# Altium PCB RF315.PcbDoc
Units mil, origin at the board's own origin, x right, y up, seen from the top; angles counter-clockwise.
Board outline 6000 x 4000 mil, 2 copper layers (Top Layer, Bottom Layer); 22 components, 19 nets, 71 pads, 2 vias.
Unrouted connection lines stored in the file: 4.
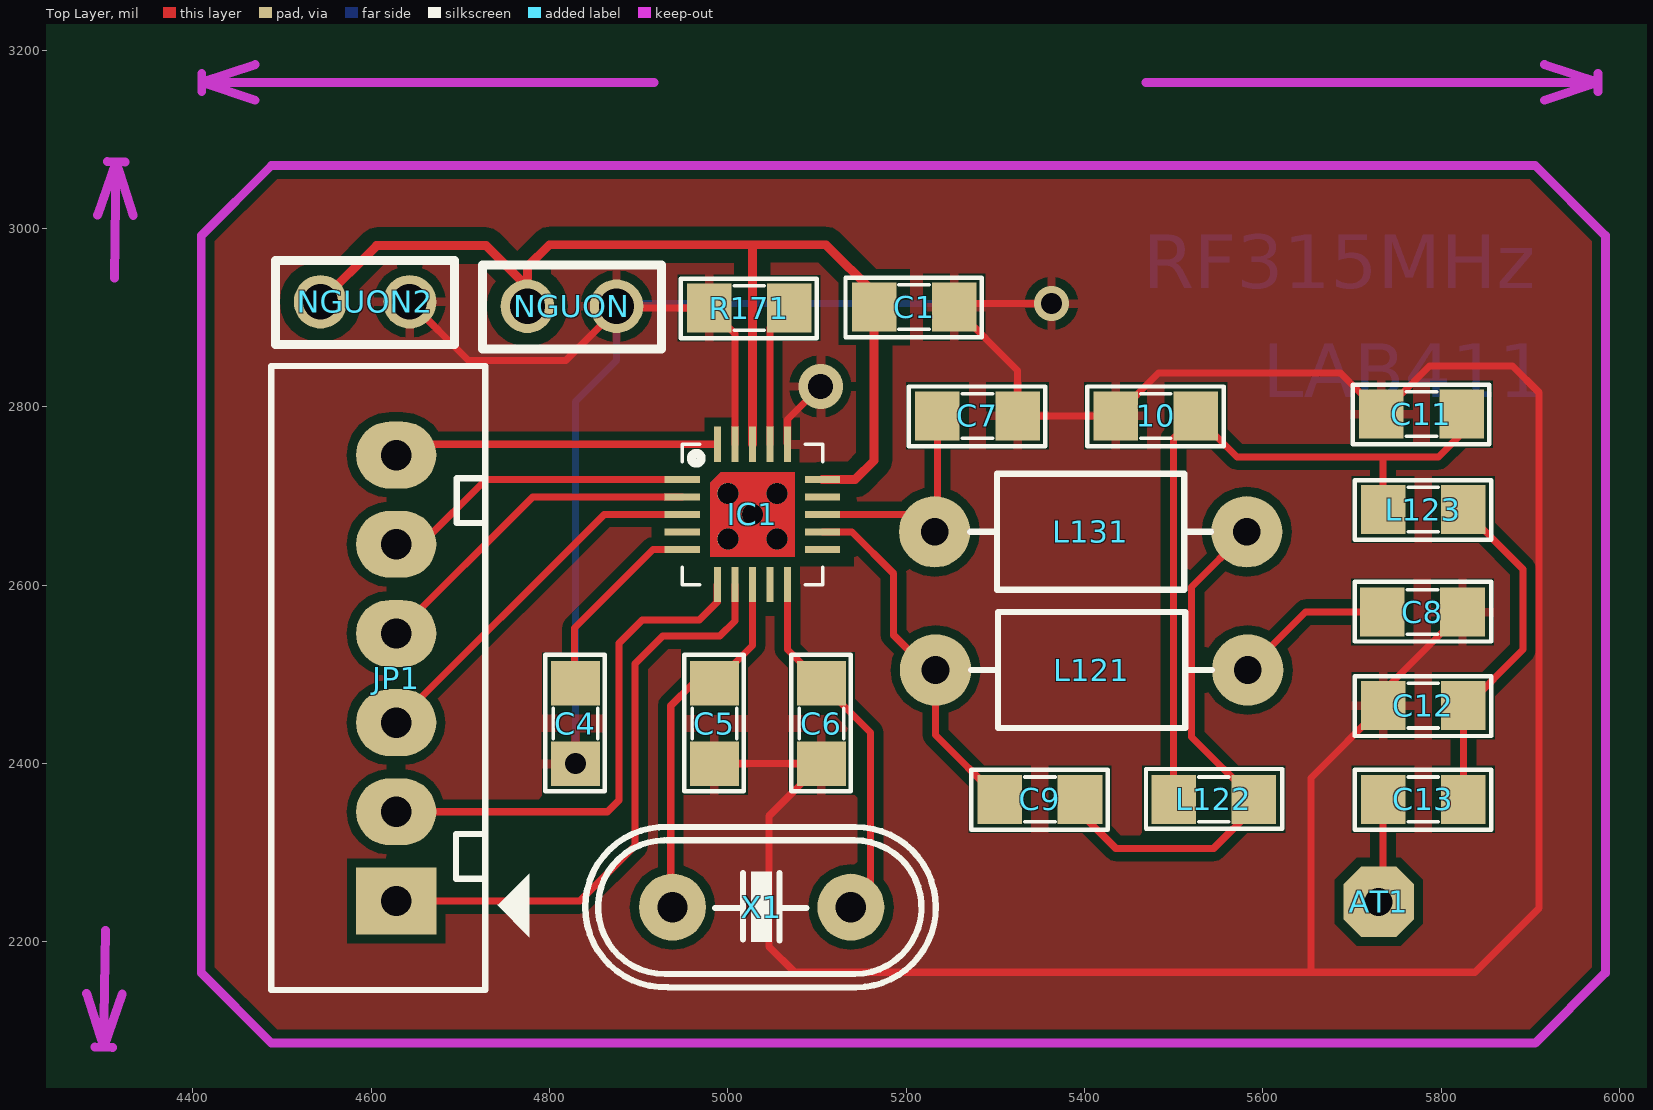
[diagram p0: Top Layer view]
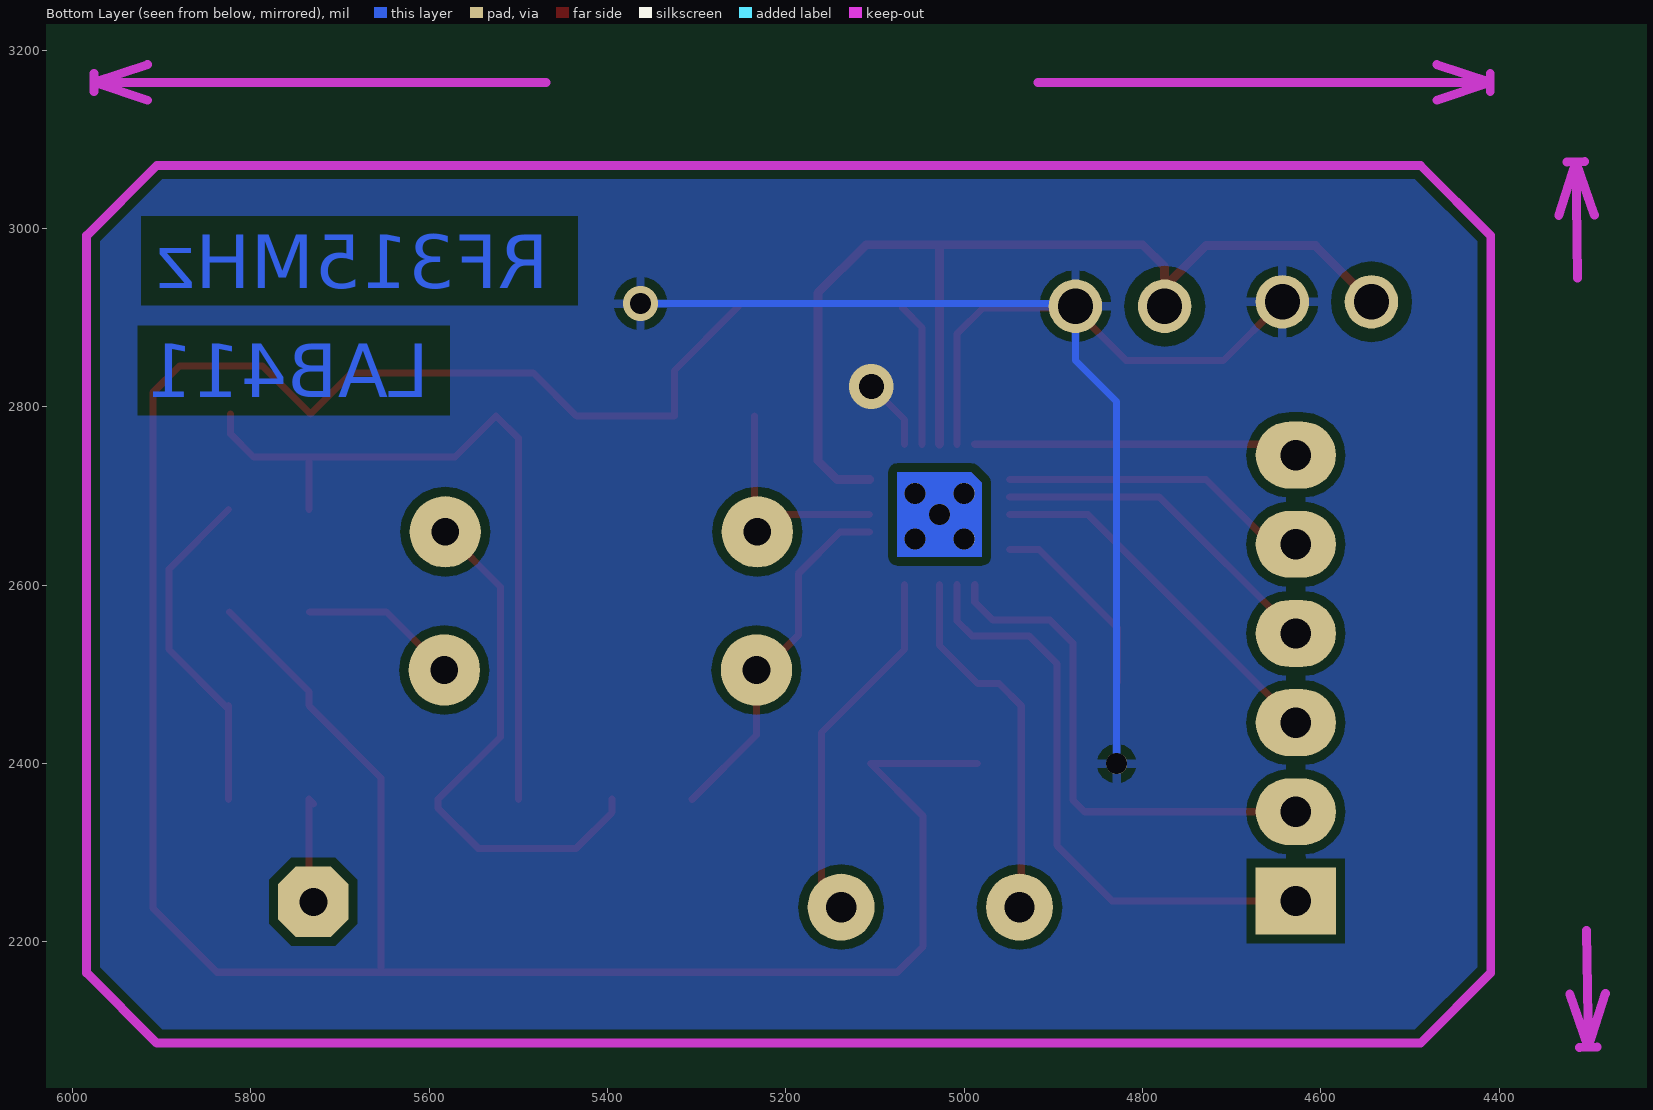
[diagram p1: Bottom Layer view, seen from below]
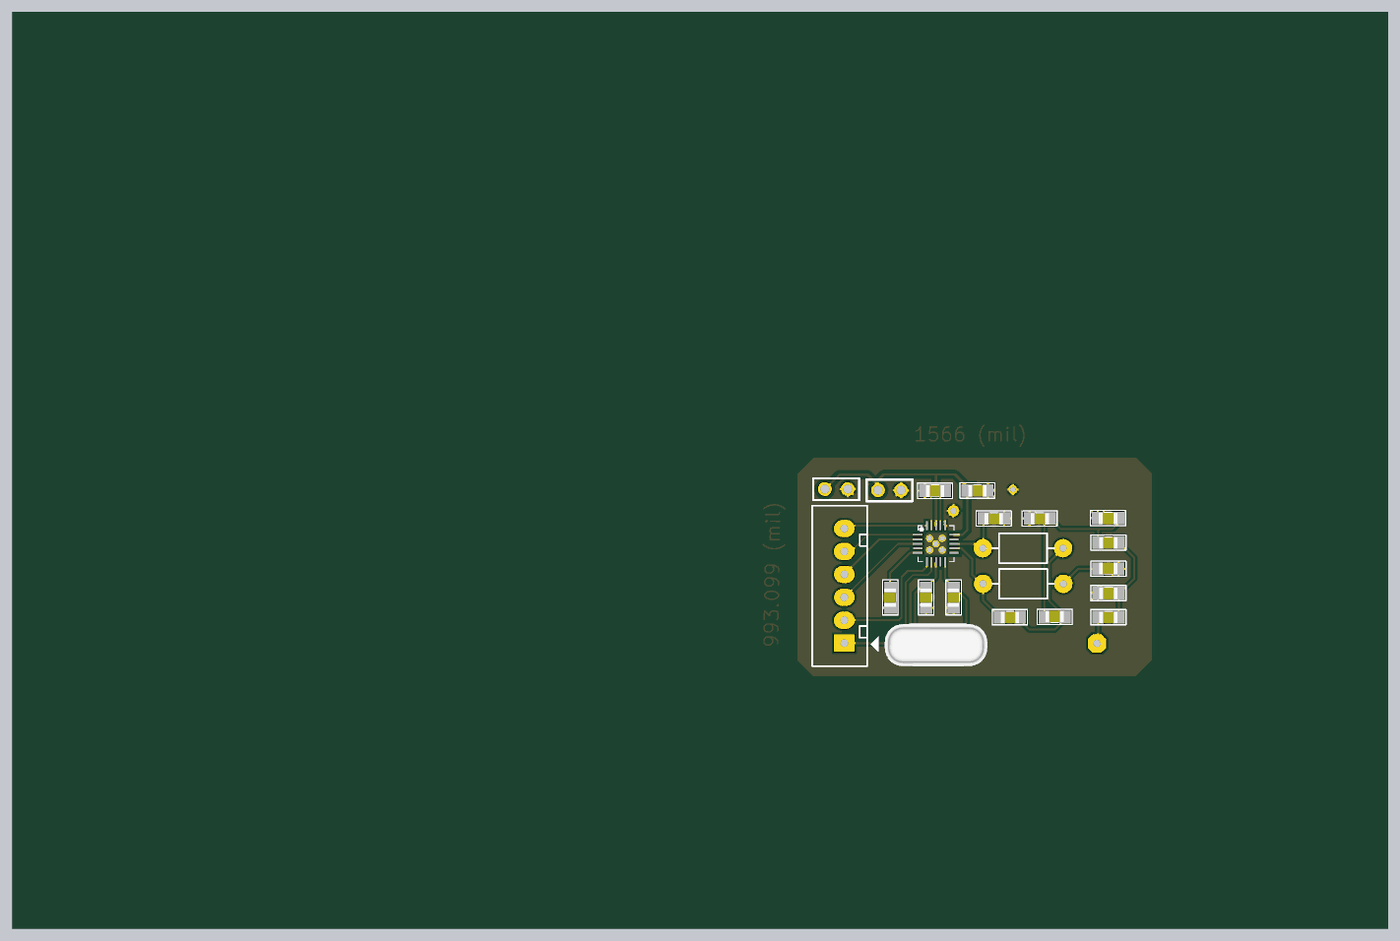
[diagram p2: 3D render of the assembled board from above, using the file's embedded part models]

## Layer stack, top to bottom
Top Layer: signal copper 1.4
Dielectric: dielectric 12.6, FR-4, Dk 4.8
Bottom Layer: signal copper 1.4

## Board outline
1000,1000 7000,1000 7000,5000 1000,5000

## Design rules (kind name [scope] priority, off if disabled: settings)
Clearance Clearance_1 [InNet('3.3V')] p1: gap=15
Clearance [All] p2: gap=10
PolygonConnect [All] p1: connectstyle=Relief reliefconductorwidth=10 reliefentries=4 polygonreliefangle="90 Angle" airgapwidth=10
RoutingVias [All] p1: holewidth=28 width=50 viastyle="Through Hole" minholewidth=28 minwidth=50 maxholewidth=28 maxwidth=50
SolderMaskExpansion [All] p1: expansion=4
Width Width_1 [InNet('3.3V')] p1: maxlimit=10 minlimit=10 preferedwidth=10
Width [All] p2: maxlimit=8 minlimit=8 preferedwidth=8
28 further rules are at their usual default settings.

## Components (designator, comment, footprint, x,y, rotation, side; value= is the part's Value field where it differs from the comment)
10 "33" SM-0805 5480,2790 r0 top
AT1 "Anten" VIT 5730,2245 r0 top
C1 "101" SM-0805 5209,2912 r0 top
C4 "101" SM-0805 4829,2445 r270 top
C5 "27" SM-0805 4985,2445 r270 top
C6 "27" SM-0805 5105,2445 r270 top
C7 "6.8" SM-0805 5280,2790 r0 top
C8 "220" SM-0805 5779,2570 r180 top
C9 "15" SM-0805 5350,2360 r0 top
C11 "33" SM-0805 5778,2792 r0 top
C12 "6.8" SM-0805 5780,2465 r0 top
C13 "220" SM-0805 5780,2360 r0 top
IC1 "CC1100E" CC1101-20P 4752,3270 r0 top
JP1 "JP6" CON6 4628,2246 r90 top
L121 "150mH" L/0.4 5583,2505 r180 top
L122 "150mH" SM-0805 5545,2360 r180 top
L123 "150mH" SM-0805 5780,2685 r0 top
L131 "150mH" L/0.4 5232,2660 r0 top
NGUON "JP2" CON2 4824,2913 r180 top
NGUON2 "JP2" CON2 4592,2918 r180 top
R171 "33K" SM-0805 5024,2911 r0 top
X1 "4Mhz" XT2 5038,2239 r0 top

## Footprints (in the part's own frame and the unit in brackets; to place one, negate y for a bottom-side part, rotate by r counter-clockwise, add the part's x,y. Pads: shape width x height; smd on the part's side, far side on the other; paste and mask are expansions set on the pad)
CC1101-20P [mm] "CC1101/RF/TI"
  rect 1x0.2 smd: 1(5,-14) 2(5,-14.5) 3(5,-15) 4(5,-15.5) 5(5,-16) 11(9,-16) 12(9,-15.5) 13(9,-15) 14(9,-14.5) 15(9,-14)
  rect 0.2x1 smd: 6(6,-17) 7(6.5,-17) 8(7,-17) 9(7.5,-17) 10(8,-17) 16(8,-13) 17(7.5,-13) 18(7,-13) 19(6.5,-13) 20(6,-13)
  round 0.6 hole 0.6: 32(7,-15) ""(6.3,-15.7) ""(6.3,-14.4) ""(7.7,-15.7) ""(7.7,-14.4)
  Top Layer region: 6.1,-13.8 5.8,-14.1 5.8,-16.2 8.2,-16.2 8.2,-13.8
  Bottom Layer region: 6.1,-13.8 5.8,-14.1 5.8,-16.2 8.2,-16.2 8.2,-13.8
  silkscreen extent 5,-17 9,-13
CON2 [mil] "2-Pin Connector; pitch 2.54mm"
  round 60 hole 39.37: 1(-51.18,0) 2(48.82,0)
  silkscreen extent -102,-46 99,48
CON6 [mil] "CON6"
  rect 75x90 hole 34: 1(0,0)
  oval 75x90 hole 34: 2(100,0) 3(200,0) 4(300,0) 5(400,0) 6(500,0)
  silkscreen extent -100,-150 600,140
L/0.4 [mil] "Inductor , 2 Pin, L 350mil, W 150 mil"
  round 80 hole 31: 1(0,0) 2(350,0)
  silkscreen extent 40,-65 310,65
SM-0805 [mil] "Compoment SMD 80x50mil"
  rect 50x55 smd: 1(-45,0) 2(45,0)
  silkscreen extent -77,-34 76,33, body extent -40,-27 40,23, height 24
VIT [mm] "VIT"
  oct 2x2 hole 0.8: VIT1(0,0)
XT2 [mil] "Footpin for Crystal 2 pin"
  round 75 hole 34: 1(-100,0) 2(100,0)
  silkscreen extent -198,-90 195,90, body extent -233,-93 213,90, height 138

## Part data
10 C1 C4 C5 C6 C7 C8 C9 C11 C12 C13: library part CM, "Cap SMD"
JP1: library part Con6, "Connector 6"
L121 L122 L123 L131: library part L1, "Inductor"
NGUON NGUON2: library part Con2, "Connector 2"
R171: library part R, "Resistor 1/4W"
X1: library part XT2, "Crystal For all Crystal 2pin."

## Free pads (board coordinates)
  round 23.62 hole 23.62: 0(4829,2400)

## Via types
v1: diameter 50, hole 28, Top Layer to Bottom Layer, 1 vias
v2: diameter 39.37, hole 23.62, Top Layer to Bottom Layer, 1 vias

## Nets (pads, with @x,y where several pads share a name; then routed paths per layer and width w, separated by ;. In a path a pad name is that pad's centre, name@x,y a point inside that pad or via, vN(x,y) a via of type N, cw(c..) or ccw(c..) an arc to the next point about the centre after c; other vN are vias at no path point)
3.3V: C1.1 IC1.4 IC1.9 IC1.11 IC1.14 IC1.15 IC1.18 NGUON2.2 NGUON.2 | length 1221.4
  Top Layer w10: NGUON2.2 4606.18,2981 4729,2981 NGUON.2@4775.18,2934.82 ; NGUON.2 NGUON.2@4775.18,2934.82 ; IC1.18 5027.59,2981.41 5027,2982 ; IC1.15 5142.82,2718.82 5164,2740 C1.1 5164,2928 5110,2982 5027,2982 ; NGUON.2@4775.18,2934.82 4775.18,2957.18 4800,2982 5027,2982
CS: IC1.7 JP1.1 | length 670.2
  Top Layer w8: JP1.1 4834,2246 4896,2308 4896,2512 4927,2543 4991,2543 5007.91,2559.91 IC1.7
GDO0: IC1.6 JP1.2 | length 580.2
  Top Layer w8: JP1.2 4865,2346 4878,2359 4878,2535 4904,2561 4968,2561 4988.22,2581.22 IC1.6
GND: 10.1 C1.2 C4.2 C5.2 C6.2 C7.2 C8.1 C11.1 C12.1 IC1.16 IC1.19 NGUON2.1 NGUON.1 pad.0 R171.1 | length 4882.2
  Top Layer w8: NGUON2.1 4709.18,2852 4818.18,2852 4877.18,2911 R171.1 5007.91,2882.09 IC1.19 ; C5.2 C6.2 5046,2341 5046,2195 5075,2166 5654,2166 ; IC1.16 5066.96,2785.96 v1(5104,2823) ; v2(5363,2916) 5258,2916 C1.2 5325,2841 C7.2 10.1 5483,2838 5687,2838 C11.1 5787,2846 5880,2846 5910,2816 5910,2238 5838,2166 5654,2166 ; C8.1 5735,2481 C12.1 5654,2384 5654,2166
  Bottom Layer w8: pad.0 4829,2806 4875.18,2852.18 NGUON.1 4878.18,2916 v2(5363,2916)
GNDO2: IC1.3 JP1.3 | length 417.5
  Top Layer w8: JP1.3 4861.45,2679.45 IC1.3
Net10_2: 10.2 C11.2 L122.2 L123.1 | length 849.6
  Top Layer w8: L122.2 5500,2765 10.2 5571,2744 5734,2744 ; L123.1 5735,2743 5734,2744 ; C11.2 5823,2770 5797,2744 5734,2744
NetAT1_1: AT1.VIT1 C13.1 | length 124.1
  Top Layer w8: AT1.VIT1 5735,2250 C13.1 C13.1@5730,2355
NetC4_1: C4.1 IC1.5 | length 219.7
  Top Layer w8: C4.1 4828,2491 4828,2552 4916.08,2640.08 IC1.5
NetC5_1: C5.1 IC1.8 X1.1 | length 414.5
  Top Layer w8: X1.1 4936,2241 4936,2465 4961,2490 C5.1 5027.59,2532.59 IC1.8
NetC6_1: C6.1 IC1.10 X1.2 | length 409.4
  Top Layer w8: IC1.10 5066.96,2528.04 C6.1 5160,2435 5160,2261 X1.2
NetC7_1: C7.1 IC1.13 L131.1 | length 262.5
  Top Layer w8: IC1.13 5218.55,2679.45 5235,2663 C7.1
NetC8_2: C8.2 L121.1 | length 177.9
  Top Layer w8: L121.1 5648,2570 C8.2
NetC9_1: C9.1 IC1.12 L121.2 | length 406
  Top Layer w8: IC1.12 5139.24,2659.76 5186,2613 5186,2544 5225,2505 L121.2 5233,2432 C9.1
NetC9_2: C9.2 L122.1 L131.2 | length 609.9
  Top Layer w8: C9.2 5395,2345 5435,2305 5545,2305 5590,2350 L122.1 5520,2430 5520,2598 L131.2
NetC12_2: C12.2 C13.2 L123.2 | length 384.5
  Top Layer w8: C13.2 C12.2 5827,2463 5892,2528 5892,2618 L123.2
NetIC1_17: IC1.17 R171.2 | length 161.8
  Top Layer w8: IC1.17 5047.28,2889.28 R171.2
SCK: IC1.1 JP1.5 | length 351
  Top Layer w8: JP1.5 4656,2646 4728.82,2718.82 IC1.1
SI: IC1.20 JP1.6 | length 365.3
  Top Layer w8: JP1.6 4640.19,2758.19 IC1.20
SO: IC1.2 JP1.4 | length 384.3
  Top Layer w8: JP1.4 4781.13,2699.13 IC1.2
pads on no net: IC1. IC1.32

## Polygon pours and split planes (outlines as drawn)
GND on Top Layer "Top Layer-No Net" (solid, remove dead copper, pour order 2): 4485.01,3073.29 4406.27,2994.55 4406.27,2173.43 4485.01,2094.69 4485.01,2089.04 5902.33,2089.04 5981.07,2167.78 5981.08,2167.78 5981.08,2994.55 5981.07,2994.55 5904.82,3070.81 4487.5,3070.81 4485.01,3073.29 4478.82,3067.1
GND on Bottom Layer "Top Layer-No Net" (solid, remove dead copper, pour order 8): 5905.51,3070.87 5984.25,2992.13 5984.25,2165.35 5905.51,2086.61 4488.19,2086.61 4409.45,2165.35 4409.45,2992.13 4488.19,3070.87 5905.51,3070.87

## Keep-outs
Keep-Out Layer:
  lines w10: 4280.85,2142.28 4300,2082 ; 4290,2082.14 4310,2081.86 ; 4293.16,3015.29 4314,3075 ; 4301.84,2212.65 4300,2082 ; 4304,3075.14 4324,3074.86 ; 4312.16,2944.35 4314,3075 ; 4320.84,2141.71 4300,2082 ; 4333.15,3014.72 4314,3075 ; 4410,3154 4410,3174 ; 4470,3144 4410,3164 ; 4470,3184 4410,3164 ; 4917.08,3164 4410,3164 ; 5468.92,3164 5976,3164 ; 5916,3144 5976,3164 ; 5916,3184 5976,3164 ; 5976,3154 5976,3174 ; 4409.45,2992.13 4409.45,2165.35 4488.19,2086.61 ; 4409.45,2992.13 4409.45,2992.13 ; 4409.45,2992.13 4488.19,3070.87 5393.7,3070.87 5905.51,3070.87 5984.25,2992.13 ; 4488.19,2086.61 5905.51,2086.61 5984.25,2165.35 ; 4488.19,2086.61 4488.19,2086.61 ; 5984.25,2165.35 5984.25,2992.13 ; 5984.25,2165.35 5984.25,2165.35 ; 5984.25,2992.13 5984.25,2992.13
  text "1566 (mil)" at 4927.08,3128.01 h60
  text "993.099 (mil)" at 4337.97,2222.14 h60 r89.19

## Other copper
Bottom Layer:
  text "RF315MHz" at 5466,2933 h60
  text "LAB411" at 5600,2811 h60